# EAGLE board GasSensorCentral_v2.0 (EAGLE 7.2.0)

Size 100 x 80 mm. Coordinates in mm from the lower left corner, seen from the top.
Outline: 0,0 100,0 100,80 0,80 0,0
Copper layers (1*16): Top 0.035mm / dielectric 1.5mm / Bottom 0.035mm
Design rules "default": minimum track width 10mil, minimum drill 24mil, track to track 8mil, track to pad 8mil, pad to pad 8mil, via to via 8mil, smd to smd 8mil, copper to edge 40mil, drill to drill 8mil, minimum pad ring 10mil, minimum via ring 8mil, stop-mask expansion 4mil, vias tented up to drill 0mil, thermal gap 10mil
tRestrict: area 40,50.8 to 47.6,58.4; area 46.3,61.2 to 49.2,64; 2 lines
bRestrict: area 40,50.8 to 47.6,58.4; area 46.3,61.2 to 49.2,64

## Footprints (pad centres in the part's own frame; a part is rotated, then mirrored left to right if it is on the bottom)
B3F-10XX = drill 1.016 long: 1 -3.251,2.261; 2 3.251,2.261; 3 -3.251,-2.261; 4 3.251,-2.261
C025-025X050 = drill 0.813 octagon: 1 -1.27,0; 2 1.27,0
E2,5-5 = drill 0.813 pad 1.6: + -1.27,0 | drill 0.813 pad 1.6 octagon: - 1.27,0
E5-13 = drill 1.016 pad 2.54: + -2.54,0 | drill 1.016 pad 2.54 octagon: - 2.54,0
DO41-7.6 = drill 1.1 pad 1.7: A 3.81,0; C -3.81,0
DO41-10 = drill 1.118: A 5.08,0; C -5.08,0
TJ4-U1 = drill 0.9: 1 -3.935,0; 2 3.935,0
CR2032H = drill 1.118 pad 2.54 octagon: + 0,14; - 0,-6.5
TO220H = drill 1.118 long: 1 -2.54,-10.16; 2 0,-10.16; 3 2.54,-10.16 | hole 3.302: 0,4.826
DIL28-3 = drill 0.813 long: 1 -16.51,-3.81; 2 -13.97,-3.81; 3 -11.43,-3.81; 4 -8.89,-3.81; 5 -6.35,-3.81; 6 -3.81,-3.81; 7 -1.27,-3.81; 8 1.27,-3.81; 9 3.81,-3.81; 10 6.35,-3.81; 11 8.89,-3.81; 12 11.43,-3.81; 13 13.97,-3.81; 14 16.51,-3.81; 15 16.51,3.81; 16 13.97,3.81; 17 11.43,3.81; 18 8.89,3.81; 19 6.35,3.81; 20 3.81,3.81; 21 1.27,3.81; 22 -1.27,3.81; 23 -3.81,3.81; 24 -6.35,3.81; 25 -8.89,3.81; 26 -11.43,3.81; 27 -13.97,3.81; 28 -16.51,3.81
TO220-52 = drill 0.9 long: 1 -3.4,-21.1; 2 -1.7,-18.47; 3 0,-21.1; 4 1.7,-18.47; 5 3.4,-21.1 | hole 3.8: 0,-2.8
SO16 = smd 0.66 x 2.032: 1 -4.445,-3.073; 2 -3.175,-3.073; 3 -1.905,-3.073; 4 -0.635,-3.073; 5 0.635,-3.073; 6 1.905,-3.073; 7 3.175,-3.073; 8 4.445,-3.073; 9 4.445,3.073; 10 3.175,3.073; 11 1.905,3.073; 12 0.635,3.073; 13 -0.635,3.073; 14 -1.905,3.073; 15 -3.175,3.073; 16 -4.445,3.073
2X05 = drill 1.016 octagon: 1 -5.08,-1.27; 2 -5.08,1.27; 3 -2.54,-1.27; 4 -2.54,1.27; 5 0,-1.27; 6 0,1.27; 7 2.54,-1.27; 8 2.54,1.27; 9 5.08,-1.27; 10 5.08,1.27
1X02 = drill 1.016 long: 1 -1.27,0; 2 1.27,0
LED3MM = drill 0.813 octagon: A -1.27,0; K 1.27,0
WIRELESS-NRD24L01-PA-EXT = drill 1 square: 1 -18.415,3.81 | drill 1: 2 -15.875,3.81; 3 -18.415,1.27; 4 -15.875,1.27; 5 -18.415,-1.27; 6 -15.875,-1.27; 7 -18.415,-3.81; 8 -15.875,-3.81
PWR_JACK_UNI_MILLING = drill 1: + 0,4.75; +1 0,5.25; +2 0,5.75; +3 0,6.25; +4 0,4.25; +5 0,3.75; +6 0,3.25; - -6.5,4.75; -1 -6.5,5.25; -2 -6.5,5.75; -3 -6.5,4.25; -4 -6.5,3.75; -5 -6.5,6.25; -6 -6.5,3.25; -- -3.3,0.3; --1 -3.8,0.3; --2 -4.3,0.3; --3 -4.8,0.3; --4 -2.8,0.3; --5 -2.3,0.3; --6 -1.8,0.3
TC26V = drill 0.813: 1 -1.27,0; 2 1.27,0
QS = drill 0.61 long: 1 -2.54,0; 2 2.54,0
SOT54E = drill 0.813 octagon: D -1.27,0; G 0,1.905; S 1.27,0
0207/10 = drill 0.813 octagon: 1 -5.08,0; 2 5.08,0
SIMHOLDER3 = smd 2.2 x 1.2: 1 0.95,4.81; 2 0.91,7.41; 3 0.95,9.86 | smd 2 x 1.2: 4 26.2,9.78; 5 26.22,7.34; 6 26.22,4.98
TO92 = drill 0.813 octagon: 1 1.27,0; 2 0,1.905; 3 -1.27,0
RS-2,5 = drill 0.813 pad 1.6 octagon: 1 -1.27,0; 2 1.27,0
SIM900 = smd 1.93 x 0.66: 1 -12,8; 2 -12,7; 3 -12,6; 4 -12,5; 5 -12,4; 6 -12,3; 7 -12,2; 8 -12,1; 9 -12,0; 10 -12,-1; 11 -12,-2; 12 -12,-3; 13 -12,-4; 14 -12,-5; 15 -12,-6; 16 -12,-7; 17 -12,-8; 35 12,-8; 36 12,-7; 37 12,-6; 38 12,-5; 39 12,-4; 40 12,-3; 41 12,-2; 42 12,-1; 43 12,0; 44 12,1; 45 12,2; 46 12,3; 47 12,4; 48 12,5; 49 12,6; 50 12,7; 51 12,8 | smd 0.66 x 1.93: 18 -8,-12; 19 -7,-12; 20 -6,-12; 21 -5,-12; 22 -4,-12; 23 -3,-12; 24 -2,-12; 25 -1,-12; 26 0,-12; 27 1,-12; 28 2,-12; 29 3,-12; 30 4,-12; 31 5,-12; 32 6,-12; 33 7,-12; 34 8,-12; 52 8,12; 53 7,12; 54 6,12; 55 5,12; 56 4,12; 57 3,12; 58 2,12; 59 1,12; 60 0,12; 61 -1,12; 62 -2,12; 63 -3,12; 64 -4,12; 65 -5,12; 66 -6,12; 67 -7,12; 68 -8,12
SO08 = smd 0.61 x 2.21: 1 -1.905,-2.616; 2 -0.635,-2.616; 3 0.635,-2.616; 4 1.905,-2.616; 5 1.905,2.616; 6 0.635,2.616; 7 -0.635,2.616; 8 -1.905,2.616
MX-47219-2001 = smd 0.8 x 1.5: 1 10.08,2.6; 2 8.98,2.6; 3 7.88,2.6; 4 6.78,2.6; 5 5.68,2.6; 6 4.58,2.6; 7 3.48,2.6; 8 2.38,2.6 | smd 1.45 x 2: G1 13.75,0; G2 13.75,8.3; G3 0,8.3; G4 0,0
BU-SMA-G = drill 1.4: 1 0,0 | drill 1.2: 2 -2.55,2.55; 3 2.55,2.55; 4 2.55,-2.55; 5 -2.55,-2.55

## Placement (x,y rotation side)
BUTTON1  [B3F-10XX]  -56,-56 0 top  (outside the outline)
BUTTON2  [B3F-10XX]  -67,-56 0 top  (outside the outline)
BUTTON3  [B3F-10XX]  -78,-56 0 top  (outside the outline)
BUTTON4  [B3F-10XX]  -89,-56 0 top  (outside the outline)
C1  100nF  [C025-025X050]  19.86,71.02 0 top
C2  2.2uF  [E2,5-5]  16.67,71.1 270 top
C3  100nF  [C025-025X050]  63.5,22.86 90 top
C4  100nF  [C025-025X050]  56.88,5.08 270 top
C5  330nF  [C025-025X050]  14.86,66.32 0 top
C6  100nF  [C025-025X050]  15.4,68.94 270 top
C7  100nF  [C025-025X050]  53.34,5.08 270 top
C8  22pF  [C025-025X050]  58.42,26.67 0 top
C9  100nF  [C025-025X050]  20.59,67.62 180 top
C10  1uF  [E2,5-5]  15.59,67.51 0 top
C11  100nF  [C025-025X050]  18.59,69.43 180 top
C12  22pF  [C025-025X050]  53.34,26.67 180 top
C13  100uF  [E2,5-5]  14.04,71.72 0 top
C14  4.7uF  [E2,5-5]  34.24,30.51 180 top
C15  3300uF  [E5-13]  18.16,71.93 180 top
C16  4.7uF  [C025-025X050]  47.62,38.1 90 top
C17  1uF  [E2,5-5]  11.93,71.75 0 top
C18  10uF  [E2,5-5]  41.91,19.68 0 top
C19  100nF  [C025-025X050]  79.38,41.91 270 top
C20  100nF  [C025-025X050]  28.75,44.72 90 top
C21  100uF  [E2,5-5]  54.61,71.12 0 top
C22  1uF  [E2,5-5]  2,-3 0 top
D1  1N5823  [DO41-7.6]  10.94,69.61 90 top
D2  1N4001  [DO41-10]  20.7,69.62 90 top
D3  1N4001  [DO41-10]  71.12,26.67 0 top
DPU068A3  68uH  [TJ4-U1]  13.16,71.77 90 top
G1  CR2032H  [CR2032H]  20.76,17.3 180 top
IC1  LF33CV  [TO220H]  13.43,71.37 90 top
IC2  MEGA8-P  [DIL28-3]  57.15,13.97 180 top
IC3  7805T  [TO220H]  13.43,70.67 90 top
IC4  LM2576H  [TO220-52]  3.81,72.61 90 top
IC6  4050D  [SO16]  33.35,35.83 0 bottom
ISP  [2X05]  38.73,77.47 0 top
JP1  [1X02]  -46,-10 0 top  (outside the outline)
JP3  [1X02]  52.07,36.2 0 top
LED1  White  [LED3MM]  80.01,16.51 90 top
LED2  Blue  [LED3MM]  81.28,31.75 0 top
LED3  Blue  [LED3MM]  81.28,36.83 0 top
LED4  White  [LED3MM]  -47,-40 0 top  (outside the outline)
LED5  Blue  [LED3MM]  18.59,65.81 90 top
LED6  Yellow  [LED3MM]  41.91,25.4 0 top
LED7  White  [LED3MM]  -47,-50 0 top  (outside the outline)
LED8  White  [LED3MM]  -47,-60 0 top  (outside the outline)
M1  NRF24L01  [WIRELESS-NRD24L01-PA-EXT]  21.3,9.21 180 top
PWR1  [PWR_JACK_UNI_MILLING]  18.61,63.45 0 top
Q1  32.768K-20PPM  [TC26V]  29.84,13.34 0 top
Q2  [QS]  55.88,22.86 180 top
Q3  BS170  [SOT54E]  62.23,35.56 90 top
Q4  BS170  [SOT54E]  62.23,30.48 90 top
R1  10k  [0207/10]  71.12,36.83 0 top
R2  10k  [0207/10]  71.12,34.29 0 top
R3  330  [0207/10]  71.12,21.59 180 top
R4  22k  [0207/10]  71.12,24.13 180 top
R5  10k  [0207/10]  63.5,3.81 0 top
R7  10k  [0207/10]  71.12,31.75 0 top
R8  3.6k  [0207/10]  18.32,71.31 270 top
R9  47k  [0207/10]  34.29,13.97 90 top
R11  10k  [0207/10]  17.51,66.62 90 top
R12  4.7k  [0207/10]  36.83,13.97 90 top
R13  4.7k  [0207/10]  71.12,57.15 180 top
R14  47k  [0207/10]  71.12,59.69 0 top
R15  330  [0207/10]  71.12,49.53 180 top
R16  1k  [0207/10]  45.72,29.21 0 top
R17  22R  [0207/10]  71.12,41.91 180 top
R18  22R  [0207/10]  71.12,44.45 180 top
R19  4.7k  [0207/10]  71.12,54.61 180 top
R20  10k  [0207/10]  -43,-16 0 top  (outside the outline)
R21  10k  [0207/10]  -43,-21 0 top  (outside the outline)
R22  1.5k  [0207/10]  12.86,72.31 90 top
R23  10k  [0207/10]  -43,-26 0 top  (outside the outline)
R24  10k  [0207/10]  71.12,29.21 0 top
R25  10k  [0207/10]  -43,-31 0 top  (outside the outline)
R26  330  [0207/10]  -43,-36 0 top  (outside the outline)
R27  22R  [0207/10]  71.12,39.37 0 top
R28  47k  [0207/10]  71.12,52.07 0 top
R29  330  [0207/10]  71.12,46.99 180 top
R30  330  [0207/10]  -43,-46 0 top  (outside the outline)
R31  330  [0207/10]  -43,-56 0 top  (outside the outline)
R32  10k  [0207/10]  -88,-66 0 top  (outside the outline)
R33  10k  [0207/10]  -88,-71 0 top  (outside the outline)
RESET  [B3F-10XX]  81.28,24.13 270 top
RESET_GSM  [B3F-10XX]  30.48,68.58 90 top
SIMHOLDER  SIMHOLDER3  [SIMHOLDER3]  63.5,41.91 0 bottom
T1  BC547  [TO92]  74.93,64.77 0 top
T2  BC547  [TO92]  67.31,64.77 0 top
T3  BC547  [TO92]  35.56,24.13 180 top
TR1  10k  [RS-2,5]  60.96,6.35 0 top
U2  SIM900  [SIM900]  48.26,54.61 0 top
U$1  DS1307SO8  [SO08]  23.21,32.95 0 bottom
U$2  MX-47219-2001  [MX-47219-2001]  20.64,47.62 0 bottom
X1  BU-SMA-G  [BU-SMA-G]  6.44,42.14 180 top

## Library data of the parts
BUTTON1-BUTTON4 RESET RESET_GSM = switch-omron; MPN: B3F-1000; OC_FARNELL: 176432; OC_NEWARK: 36M3542
C1-C22 DPU068A3 R1-R5 R7-R9 R11-R33 = rcl
D1-D3 = diode
G1 IC4 U$2 = hosho
IC1 IC3 = linear
IC2 = atmel; OC_FARNELL: unknown; OC_NEWARK: unknown
IC6 = 40xx
ISP JP1 JP3 = pinhead
LED1-LED8 = led
M1 = diy-modules
PWR1 = iMX233-OLINUXINO-MAXI_Rev_D
Q1 = crystal; OC_FARNELL: unknown; OC_NEWARK: unknown
Q2 = special
Q3 Q4 = transistor-small-signal
SIMHOLDER = SparkFun2
T1-T3 = transistor
TR1 = discrete
U2 = ICs_v54
U$1 = SparkFun-FreqCtrl
X1 = hosho; OC_FARNELL: unknown; OC_NEWARK: unknown

## Nets
3V3: C2.+ C18.+ C22.- IC1.3 IC6.1 M1.2 U$2.4
5V0: C3.1 C6.1 C7.1 D3.C IC2.7 IC2.20 IC3.3 ISP.2 LED2.A LED3.A R2.2 R4.2 R20.2 R21.2 R23.2 R24.2 R25.2 R32.1 R33.1 TR1.1 U$1.8
BUTTON1: BUTTON1.3 BUTTON1.4 IC2.4 R20.1
BUTTON2: BUTTON2.3 BUTTON2.4 IC2.5 R21.1
BUTTON3: BUTTON3.3 BUTTON3.4 IC2.6 R23.1
BUTTON4: BUTTON4.3 BUTTON4.4 IC2.11 R25.1
CE: IC2.14 M1.3
CS: IC6.3
CSN: IC2.13 M1.4
DBG_RXD: JP3.2 U2.28
DBG_TXD: JP3.1 U2.27
DI: IC6.5
DO: U$2.7
GND: BUTTON1.1 BUTTON1.2 BUTTON2.1 BUTTON2.2 BUTTON3.1 BUTTON3.2 BUTTON4.1 BUTTON4.2 C1.2 C2.- C3.2 C4.2 C5.2 C6.2 C7.2 C8.1 C9.1 C10.- C11.1 C12.1 C13.- C14.- C15.- C16.1 C17.- C18.- C19.2 C20.1 C21.- C22.+ D1.A G1.- IC1.2 IC2.8 IC2.22 IC3.2 IC4.3 IC4.5 IC6.8 IC6.11 IC6.14 ISP.3 ISP.8 ISP.10 LED1.K LED4.K LED5.K LED7.K LED8.K M1.1 PWR1.- PWR1.-- R5.1 R9.1 R14.1 R22.2 R28.1 RESET.1 RESET.2 SIMHOLDER.6 T1.1 T2.1 T3.1 U2.17 U2.18 U2.29 U2.39 U2.45 U2.46 U2.53 U2.54 U2.58 U2.59 U2.61 U2.62 U2.63 U2.64 U2.65 U$1.4 U$2.6 U$2.G1 U$2.G2 U$2.G3 U$2.G4 X1.2 X1.3 X1.4 X1.5
IRQ: M1.8
LED1: IC2.23 R3.2
LED2: IC2.25 R26.2
LED3: IC2.12 R30.2
LED4: IC2.16 R31.2
LRXD: Q3.S R1.1 U2.10
LTXD: Q4.S R7.1 U2.9
MISO: IC2.18 ISP.9 M1.7
MOSI: IC2.17 ISP.1 M1.6
N$1: C4.1 IC2.21
N$2: Q1.1 U$1.2
N$3: IC4.4 R8.2 R22.1
N$4: D2.A PWR1.+
N$5: LED1.A R3.1
N$6: R27.2 SIMHOLDER.4
N$7: LED2.K R29.1
N$8: Q1.2 U$1.1
N$9: R13.1 R14.2 T2.2
N$10: LED5.A R11.1
N$11: LED3.K R15.1
N$12: D1.C DPU068A3.1 IC4.2
N$13: C20.2 U2.16
N$14: R9.2 R12.2 T3.2
N$15: R19.1 R28.2 T1.2
N$16: G1.+ U$1.3
N$17: C16.2 U2.26
N$18: LED4.A R26.1
N$19: LED7.A R30.1
N$20: LED8.A R31.1
N$24: R18.1 SIMHOLDER.2
N$25: R17.1 SIMHOLDER.3
N$26: IC6.2 R16.2 U$2.2
N$27: IC6.4 U$2.3
N$29: C8.2 IC2.9 Q2.1
N$30: IC6.6 U$2.5
N$31: IC6.10 LED6.A
N$32: LED6.K R16.1
N$35: C12.2 IC2.10 Q2.2
NETLIGHT: R19.2 U2.52
NETLIGHT_INFO: R29.2 T1.3
PWRKEY: RESET_GSM.3 RESET_GSM.4 T3.3 U2.1
PWRKEY_OUT: RESET_GSM.1 RESET_GSM.2 U2.2
RESET: D3.A IC2.1 ISP.5 R4.1 RESET.3 RESET.4
RF_ANT: U2.60 X1.1
RXD: IC2.2 ISP.6 Q4.D R24.1
SCK: IC2.19 ISP.7 M1.5
SCL: IC2.28 R32.2 U$1.6
SCLK: IC6.7 IC6.9
SDA: IC2.27 R33.2 U$1.5
SIM_CLK: R17.2 U2.32
SIM_DATA: R27.1 U2.31
SIM_RST: R18.2 U2.33
SIM_VDD: C19.1 SIMHOLDER.1 U2.30
SOFTRESET: IC2.15 R12.1
STATUS: R13.2 U2.66
STATUS_INFO: R15.2 T2.3
TEMP: IC2.24 R5.2 TR1.2
TXD: IC2.3 ISP.4 Q3.D R2.1
VBAT: C15.+ C21.+ DPU068A3.2 R8.1 U2.55 U2.56 U2.57
VDD_EXT: Q3.G Q4.G R1.2 R7.2 U2.15
VIN_BUTTON: C1.1 C5.1 C9.2 C10.+ C11.2 C13.+ C14.+ C17.+ IC1.1 IC3.1 IC4.1 JP1.2 R11.2
VIN_JACK: D2.C JP1.1

## Tracks (layer width: path | path; a pad name or v marks a point on that pad's centre or on a via)
3V3  (6 unrouted)
5V0  (20 unrouted)
BUTTON1  (3 unrouted)
BUTTON2  (3 unrouted)
BUTTON3  (3 unrouted)
BUTTON4  (3 unrouted)
CE  (1 unrouted)
CSN  (1 unrouted)
DBG_RXD  (1 unrouted)
DBG_TXD  (1 unrouted)
GND  (87 unrouted)
LED1  (1 unrouted)
LED2  (1 unrouted)
LED3  (1 unrouted)
LED4  (1 unrouted)
LRXD  (2 unrouted)
LTXD  (2 unrouted)
MISO  (2 unrouted)
MOSI  (2 unrouted)
N$1  (1 unrouted)
N$2  (1 unrouted)
N$3  (2 unrouted)
N$4  (1 unrouted)
N$5  (1 unrouted)
N$6  (1 unrouted)
N$7  (1 unrouted)
N$8  (1 unrouted)
N$9  (2 unrouted)
N$10  (1 unrouted)
N$11  (1 unrouted)
N$12  (2 unrouted)
N$13  (1 unrouted)
N$14  (2 unrouted)
N$15  (2 unrouted)
N$16  (1 unrouted)
N$17  (1 unrouted)
N$18  (1 unrouted)
N$19  (1 unrouted)
N$20  (1 unrouted)
N$24  (1 unrouted)
N$25  (1 unrouted)
N$26  (2 unrouted)
N$27  (1 unrouted)
N$29  (2 unrouted)
N$30  (1 unrouted)
N$31  (1 unrouted)
N$32  (1 unrouted)
N$35  (2 unrouted)
NETLIGHT  (1 unrouted)
NETLIGHT_INFO  (1 unrouted)
PWRKEY  (3 unrouted)
PWRKEY_OUT  (2 unrouted)
RESET  (5 unrouted)
RF_ANT  (1 unrouted)
RXD  (3 unrouted)
SCK  (2 unrouted)
SCL  (2 unrouted)
SCLK  (1 unrouted)
SDA  (2 unrouted)
SIM_CLK  (1 unrouted)
SIM_DATA  (1 unrouted)
SIM_RST  (1 unrouted)
SIM_VDD  (2 unrouted)
SOFTRESET  (1 unrouted)
STATUS  (1 unrouted)
STATUS_INFO  (1 unrouted)
TEMP  (2 unrouted)
TXD  (3 unrouted)
VBAT  (6 unrouted)
VDD_EXT  (4 unrouted)
VIN_BUTTON  (12 unrouted)
VIN_JACK  (1 unrouted)

## Text on the board
tPlace: Hsh20150213
bPlace: GSCv1.2